# EAGLE board master - Copy (EAGLE 6.4)
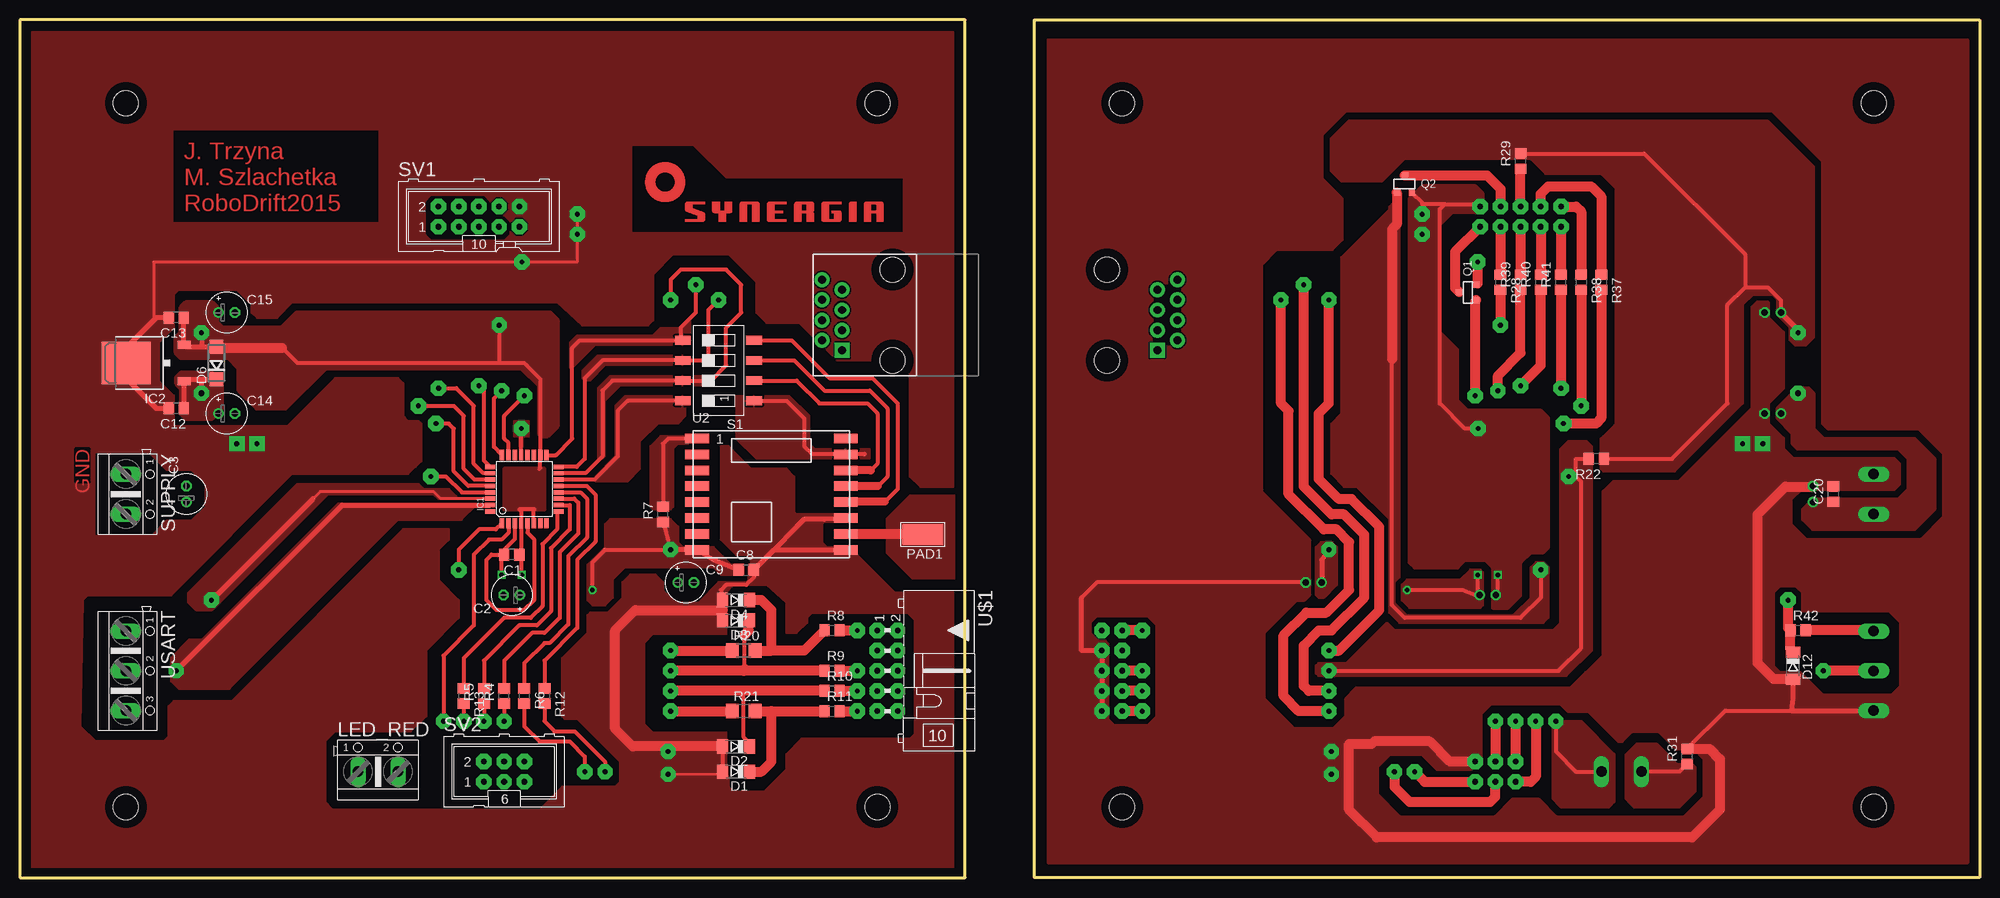
[diagram p0: board, top side]
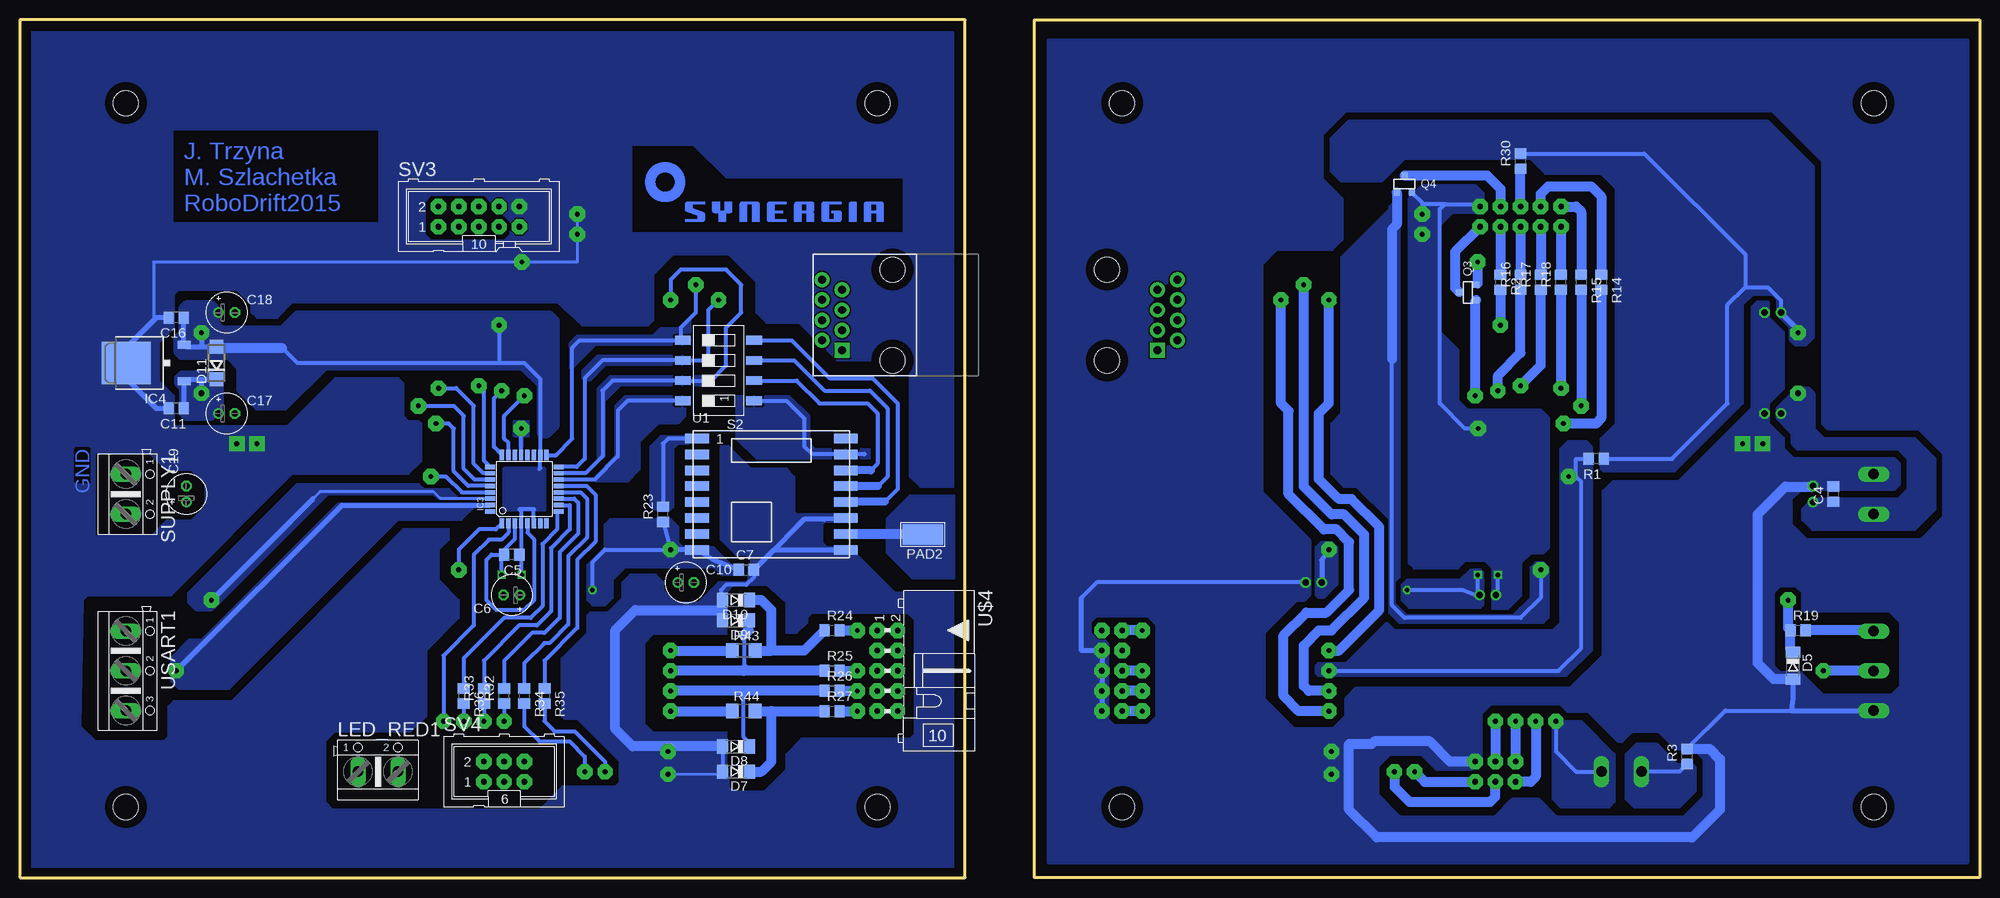
[diagram p1: board, bottom side, seen from below]

Size 246.7 x 107.95 mm. Coordinates in mm from the lower left corner, seen from the top.
Outline: 0,0 119,0 119,107.95 0,107.95 0,0
Outline: 246.7,0 127.7,0 127.7,107.95 246.7,107.95 246.7,0
Copper layers (1*16): Top 0.035mm / dielectric 1.5mm / Bottom 0.035mm
Design rules "default *": minimum track width 10mil, minimum drill 20mil, track to track 8mil, track to pad 8mil, pad to pad 8mil, via to via 8mil, smd to smd 8mil, copper to edge 40mil, drill to drill 8mil, minimum pad ring 10mil, minimum via ring 8mil, stop-mask expansion 4mil, vias tented up to drill 0mil, thermal gap 10mil
Holes 3.2 mm at 107.95,97.47 13.34,97.47 13.34,8.89 107.95,8.89 138.75,97.47 233.36,97.47 233.36,8.89 138.75,8.89

## Footprints (pad centres in the part's own frame; a part is rotated, then mirrored left to right if it is on the bottom)
C0805 = smd 1.3 x 1.5: 1 -0.95,0; 2 0.95,0
E2-5 = drill 0.813 pad 1.27: + -1.016,0 | drill 0.813 pad 1.27 octagon: - 1.016,0
SOD80C = smd 1.4 x 1.8: A 1.7,0; C -1.7,0
DO214AC = smd 1.8 x 1.7: A 2.05,0; C -2.05,0
TQFP32-08 = smd 1.27 x 0.559: 1 -4.293,2.8; 2 -4.293,2; 3 -4.293,1.2; 4 -4.293,0.4; 5 -4.293,-0.4; 6 -4.293,-1.2; 7 -4.293,-2; 8 -4.293,-2.8; 17 4.293,-2.8; 18 4.293,-2; 19 4.293,-1.2; 20 4.293,-0.4; 21 4.293,0.4; 22 4.293,1.2; 23 4.293,2; 24 4.293,2.8 | smd 0.559 x 1.27: 9 -2.8,-4.293; 10 -2,-4.293; 11 -1.2,-4.293; 12 -0.4,-4.293; 13 0.4,-4.293; 14 1.2,-4.293; 15 2,-4.293; 16 2.8,-4.293; 25 2.8,4.293; 26 2,4.293; 27 1.2,4.293; 28 0.4,4.293; 29 -0.4,4.293; 30 -1.2,4.293; 31 -2,4.293; 32 -2.8,4.293
TO252 = smd 1 x 1.6: 1 -2.28,-4.8; 2 2.28,-4.8 | smd 5.4 x 6.2: 3 0,2.5
AK500/2 = drill 1.321 long: 1 -2.515,0; 2 2.515,0
5-2,5 = smd 2.54 x 5.08: 1 0,0
SOT-23 = smd 0.762 x 0.762: 1 -0.979,-1.101; 2 0.94,-1.101; 3 0.025,1.067
R0805 = smd 1.3 x 1.5: 1 -0.95,0; 2 0.95,0
R1206 = smd 1.6 x 1.803: 1 -1.422,0; 2 1.422,0
SMS-004 = smd 1.092 x 2.007: 1 -3.81,-4.496; 2 -1.27,-4.496; 3 1.27,-4.496; 4 3.81,-4.496; 5 3.81,4.496; 6 1.27,4.496; 7 -1.27,4.496; 8 -3.81,4.496
ML10 = drill 0.7 pad 1.93 octagon: 1 -5.08,-1.27; 2 -5.08,1.27; 3 -2.54,-1.27; 4 -2.54,1.27; 5 0,-1.27; 6 0,1.27; 7 2.54,-1.27; 8 2.54,1.27; 9 5.08,-1.27; 10 5.08,1.27
ML6 = drill 0.7 pad 1.93 octagon: 1 -2.54,-1.27; 2 -2.54,1.27; 3 0,-1.27; 4 0,1.27; 5 2.54,-1.27; 6 2.54,1.27
RFM69W-XXXS2 = smd 3 x 1.2: 1 -9.35,7; 2 -9.35,5; 3 -9.35,3; 4 -9.35,1; 5 -9.35,-1; 6 -9.35,-3; 7 -9.35,-5; 8 -9.35,-7; 9 9.35,-7; 10 9.35,-5; 11 9.35,-3; 12 9.35,-1; 13 9.35,1; 14 9.35,3; 15 9.35,5; 16 9.35,7
ML10L = drill 0.7 pad 1.93 octagon: 1 -5.08,-1.27; 2 -5.08,1.27; 3 -2.54,-1.27; 4 -2.54,1.27; 5 0,-1.27; 6 0,1.27; 7 2.54,-1.27; 8 2.54,1.27; 9 5.08,-1.27; 10 5.08,1.27
RJ45-8 = drill 1 pad 1.88 square: 1 -4.445,6.35 | drill 1 pad 1.88: 2 -3.175,8.89; 3 -1.905,6.35; 4 -0.635,8.89; 5 0.635,6.35; 6 1.905,8.89; 7 3.175,6.35; 8 4.445,8.89 | hole 3.2: -5.715,0; 5.715,0
AK500/3 = drill 1.321 long: 1 -5.004,0; 2 0,0; 3 5.004,0

## Placement (x,y rotation side)
C1  100n  [C0805]  61.91,40.64 180 top
C2  22uF  [E2-5]  61.91,35.56 180 top
C3  220uF  [E2-5]  20.95,48.26 90 top
C4  100n  [C0805]  18.41,48.26 90 bottom
C5  100n  [C0805]  184.78,40.64 180 bottom
C6  22uF  [E2-5]  184.78,35.56 180 bottom
C7  100n  [C0805]  155.26,38.73 0 bottom
C8  100n  [C0805]  91.44,38.73 0 top
C9  4.7uF  [E2-5]  83.82,37.15 0 top
C10  4.7uF  [E2-5]  162.88,37.15 0 bottom
C11  100n  [C0805]  227.01,59.05 180 bottom
C12  100n  [C0805]  19.68,59.05 180 top
C13  100n  [C0805]  19.68,70.48 180 top
C14  4.7uF  [E2-5]  26.04,58.42 0 top
C15  4.7uF  [E2-5]  26.04,71.12 0 top
C16  100n  [C0805]  227.01,70.48 180 bottom
C17  4.7uF  [E2-5]  220.66,58.42 0 bottom
C18  4.7uF  [E2-5]  220.66,71.12 0 bottom
C19  220uF  [E2-5]  225.74,48.26 90 bottom
C20  100n  [C0805]  228.28,48.26 90 top
D1  3.3V  [SOD80C]  90.17,13.34 180 top
D2  3.3V  [SOD80C]  90.17,16.51 180 top
D3  3.3V  [SOD80C]  90.17,32.38 180 top
D4  3.3V  [SOD80C]  90.17,34.93 180 top
D5  3.3V  [SOD80C]  23.5,26.67 270 bottom
D6  BAS16HT1G  [DO214AC]  24.77,64.77 90 top
D7  3.3V  [SOD80C]  156.53,13.34 180 bottom
D8  3.3V  [SOD80C]  156.53,16.51 180 bottom
D9  3.3V  [SOD80C]  156.53,32.38 180 bottom
D10  3.3V  [SOD80C]  156.53,34.93 180 bottom
D11  BAS16HT1G  [DO214AC]  221.93,64.77 90 bottom
D12  3.3V  [SOD80C]  223.2,26.67 270 top
IC1  MEGA8-AI  [TQFP32-08]  63.5,48.9 90 top
IC2  lf33  [TO252]  15.88,64.77 90 top
IC3  MEGA8-AI  [TQFP32-08]  183.2,48.9 90 bottom
IC4  lf33  [TO252]  230.82,64.77 90 bottom
LED_RED  [AK500/2]  45.09,13.34 0 top
LED_RED1  [AK500/2]  201.61,13.34 0 bottom
PAD1  WIREPADSMD5-2,5  [5-2,5]  113.67,43.18 90 top
PAD2  WIREPADSMD5-2,5  [5-2,5]  133.03,43.18 90 bottom
Q1  [SOT-23]  182.25,73.66 90 top
Q2  [SOT-23]  174.31,87.31 0 top
Q3  [SOT-23]  64.45,73.66 90 bottom
Q4  [SOT-23]  72.39,87.31 0 bottom
R1  10k  [R0805]  48.26,52.7 180 bottom
R2  15R  [R0805]  60.33,74.93 270 bottom
R3  15R  [R0805]  36.83,15.24 90 bottom
R4  470  [R0805]  60.96,22.86 90 top
R5  470  [R0805]  58.42,22.86 90 top
R6  470  [R0805]  63.5,22.86 270 top
R7  10k  [R0805]  80.96,45.72 90 top
R8  220  [R0805]  102.23,31.12 0 top
R9  220  [R0805]  102.23,26.04 0 top
R10  220  [R0805]  102.23,23.5 0 top
R11  220  [R0805]  102.23,20.96 0 top
R12  470  [R0805]  66.04,22.86 270 top
R13  470  [R0805]  55.88,22.86 270 top
R14  470  [R0805]  47.62,74.93 270 bottom
R15  470  [R0805]  50.16,74.93 270 bottom
R16  470  [R0805]  57.78,74.93 90 bottom
R17  470  [R0805]  55.24,74.93 90 bottom
R18  470  [R0805]  52.7,74.93 90 bottom
R19  220  [R0805]  22.86,31.12 0 bottom
R20  0R  [R1206]  91.12,28.57 0 top
R21  0R  [R1206]  91.12,20.96 0 top
R22  10k  [R0805]  198.44,52.7 180 top
R23  10k  [R0805]  165.74,45.72 90 bottom
R24  220  [R0805]  144.46,31.12 0 bottom
R25  220  [R0805]  144.46,26.04 0 bottom
R26  220  [R0805]  144.46,23.5 0 bottom
R27  220  [R0805]  144.46,20.96 0 bottom
R28  15R  [R0805]  186.37,74.93 270 top
R29  15R  [R0805]  188.91,90.17 90 top
R30  15R  [R0805]  57.78,90.17 90 bottom
R31  15R  [R0805]  209.87,15.24 90 top
R32  470  [R0805]  185.74,22.86 90 bottom
R33  470  [R0805]  188.28,22.86 90 bottom
R34  470  [R0805]  183.2,22.86 270 bottom
R35  470  [R0805]  180.66,22.86 270 bottom
R36  470  [R0805]  190.82,22.86 270 bottom
R37  470  [R0805]  199.07,74.93 270 top
R38  470  [R0805]  196.53,74.93 270 top
R39  470  [R0805]  188.91,74.93 90 top
R40  470  [R0805]  191.45,74.93 90 top
R41  470  [R0805]  193.99,74.93 90 top
R42  220  [R0805]  223.84,31.12 0 top
R43  0R  [R1206]  155.57,28.57 0 bottom
R44  0R  [R1206]  155.57,20.96 0 bottom
S1  SWS004  [SMS-004]  87.95,63.82 90 top
S2  SWS004  [SMS-004]  158.75,63.82 90 bottom
SUPPLY  [AK500/2]  13.34,48.26 270 top
SUPPLY1  [AK500/2]  233.36,48.26 270 bottom
SV1  [ML10]  57.78,83.18 0 top
SV2  [ML6]  60.96,13.34 0 top
SV3  [ML10]  188.91,83.18 0 bottom
SV4  [ML6]  185.74,13.34 0 bottom
U1  RFM69HW  [RFM69W-XXXS2]  152.08,48.26 0 bottom
U2  RFM69HW  [RFM69W-XXXS2]  94.61,48.26 0 top
U$1  AVR_SPI_PROG2PTH2  [ML10L]  109.22,26.04 270 top
U$2  RJ45-8PTH  [RJ45-8]  109.86,70.8 90 top
U$3  [SYNERGIA_30MM]  78.74,82.55 0 top
U$4  AVR_SPI_PROG2PTH2  [ML10L]  137.48,26.04 270 bottom
U$5  RJ45-8PTH  [RJ45-8]  136.84,70.8 90 bottom
U$6  [SYNERGIA_30MM]  167.96,82.55 0 bottom
USART  [AK500/3]  13.34,26.04 270 top
USART1  [AK500/3]  233.36,26.04 270 bottom

## Library data of the parts
C1-C20 R1-R44 = rcl
D1-D12 = diode
IC1 IC3 = atmel; MPN: ATMEGA8-16AU; OC_FARNELL: 9171371; OC_NEWARK: 73M8863
IC2 IC4 = linear
LED_RED LED_RED1 SUPPLY SUPPLY1 USART USART1 = con-ptr500; OC_FARNELL: unknown; OC_NEWARK: unknown
PAD1 PAD2 = wirepad
Q1-Q4 = transistors
S1 S2 = smd-special
SV1-SV4 U$1 U$4 = con-harting-ml; OC_FARNELL: unknown; OC_NEWARK: unknown
U1 U2 = SparkFun-RF
U$2 U$5 = SparkFun
U$3 U$6 = synergia_logo

## Nets
+3V1: C5.1 C6.+ C7.1 C10.+ C16.1 C18.+ D11.A IC3.4 IC3.6 IC3.18 IC4.2 R22.1 R23.1 R28.2 R29.2 U1.8
+3V3: C1.1 C2.+ C8.1 C9.+ C13.1 C15.+ D6.A IC1.4 IC1.6 IC1.18 IC2.2 R1.1 R2.2 R7.1 R30.2 U2.8
GND: C1.2 C2.- C3.- C4.2 C8.2 C9.- C12.2 C13.2 C14.- C15.- D1.A D2.A D3.A D4.A D5.A IC1.3 IC1.5 IC1.21 IC2.3 Q3.2 Q4.2 R3.2 SUPPLY.1 SV1.10 SV2.6 U2.9 U2.11 U$1.4 U$1.6 U$1.8 U$1.10 USART.3
GND1: C5.2 C6.- C7.2 C10.- C11.2 C16.2 C17.- C18.- C19.- C20.2 D7.A D8.A D9.A D10.A D12.A IC3.3 IC3.5 IC3.21 IC4.3 Q1.2 Q2.2 R31.2 SUPPLY1.1 SV3.10 SV4.6 U1.9 U1.11 U$4.4 U$4.6 U$4.8 U$4.10 USART1.3
LED_FALSTART: R30.1 SV1.6
LED_FALSTART1: R29.1 SV3.6
LED_FALSTART_GATE: IC1.1 Q4.1
LED_FALSTART_GATE1: IC3.1 Q2.1
LED_FALSTART_GND: Q4.3 SV1.8
LED_FALSTART_GND1: Q2.3 SV3.8
LED_GO: R2.1 SV1.7
LED_GO1: R28.1 SV3.7
LED_GO_GATE: IC1.23 Q3.1
LED_GO_GATE1: IC3.23 Q1.1
LED_GO_GND: Q3.3 SV1.9
LED_GO_GND1: Q1.3 SV3.9
LED_RED: IC1.2 LED_RED.2
LED_RED1: IC3.2 LED_RED1.2
LED_S1: IC1.9 R13.1
LED_S2: IC1.10 R5.2
LED_S3: IC1.13 R12.1
LED_S4: IC1.11 R4.2
LED_S5: IC1.12 R6.1
LED_S6: IC3.9 R36.1
LED_S7: IC3.13 R35.1
LED_S8: IC3.12 R34.1
LED_S9: IC3.10 R33.2
LED_S10: IC3.11 R32.2
LED_Y1: IC1.26 R18.1
LED_Y2: IC1.27 R15.2
LED_Y3: IC1.25 R17.1
LED_Y4: IC1.28 R14.2
LED_Y5: IC1.24 R16.1
LED_Y6: IC3.26 R41.1
LED_Y7: IC3.27 R38.2
LED_Y8: IC3.25 R40.1
LED_Y9: IC3.28 R37.2
LED_Y10: IC3.24 R39.1
MISO: IC1.16 R21.1 S1.6
MISO1: IC3.16 R44.1 S2.6
MOSI: IC1.15 R20.1 S1.7
MOSI1: IC3.15 R43.1 S2.7
N$1: D1.C R11.1 R21.2
N$2: D4.C R8.1 R20.2
N$3: LED_RED.1 R3.1
N$4: R4.1 SV2.4
N$5: R5.1 SV2.2
N$6: R6.2 SV2.5
N$7: R7.2 U2.1
N$8: S1.1 U2.15
N$9: PAD1.1 U2.10
N$10: S1.4 U2.12
N$11: S1.3 U2.13
N$12: S1.2 U2.14
N$13: R8.2 U$1.1
N$14: R11.2 U$1.9
N$15: R10.2 U$1.7
N$16: R9.2 U$1.5
N$19: R12.2 SV2.3
N$20: R13.2 SV2.1
N$21: R14.1 SV1.4
N$22: R15.1 SV1.2
N$23: R16.2 SV1.5
N$24: R17.2 SV1.3
N$25: R18.2 SV1.1
N$26: R19.2 USART.1
N$32: R23.2 U1.1
N$33: PAD2.1 U1.10
N$34: R24.2 U$4.1
N$35: R27.2 U$4.9
N$36: R26.2 U$4.7
N$37: R25.2 U$4.5
N$38: LED_RED1.1 R31.1
N$39: R32.1 SV4.4
N$40: R33.1 SV4.2
N$41: R34.2 SV4.5
N$42: R35.2 SV4.3
N$43: R36.2 SV4.1
N$44: R37.1 SV3.4
N$45: R38.1 SV3.2
N$46: R39.2 SV3.5
N$47: R40.2 SV3.3
N$48: R41.2 SV3.1
N$49: R42.2 USART1.1
N$57: D10.C R24.1 R43.2
N$58: D7.C R27.1 R44.2
N$59: S2.1 U1.15
N$60: S2.4 U1.12
N$61: S2.3 U1.13
N$62: S2.2 U1.14
RESET: D3.C IC1.29 R1.2 R9.1
RESET1: D9.C IC3.29 R22.2 R25.1
RX: D5.C IC1.30 R19.1
RX1: D12.C IC3.30 R42.1
SCK: D2.C IC1.17 R10.1 S1.5
SCK1: D8.C IC3.17 R26.1 S2.5
SS: IC1.14 S1.8
SS1: IC3.14 S2.8
TXD: IC1.31 USART.2
TXD1: IC3.31 USART1.2
VCC: C3.+ C4.1 C12.1 C14.+ D6.C IC2.1 SUPPLY.2
VCC1: C11.1 C17.+ C19.+ C20.1 D11.C IC4.1 SUPPLY1.2

## Tracks (layer width: path | path; a pad name or v marks a point on that pad's centre or on a via)
+3V1  (via drill 0.6, 0.6 pad 1.02, 0.6 pad 1.93)
  Top 0.508: v183.51,38.1 183.51,35.81 C6.+ 183.2,35.56 181.61,36.2 v174.62,36.2 | R22.1 207.96,52.7 214.95,59.69 214.95,72.07 217.17,74.29 | 217.17,74.29 220.03,74.29 221.68,72.64 C18.+ | R29.2 204.47,91.12 217.17,78.42 217.17,74.29
  Top 0.61: v164.78,41.27 163.89,40.01 C10.+ | C18.+ 223.84,68.96 v223.84,68.58
  Top 1.27: R28.2 v186.37,69.53
  Bottom 0.508: v183.51,38.1 183.51,40.32 C5.1 arc-90 183.6,40.88 IC3.4 183.6,46.12 183.83,46.36 181.93,46.36 182,46.29 IC3.6 | 213.68,66.67 211.77,64.77 186.37,64.77 | 186.37,64.77 183.2,64.77 181.2,62.77 IC3.18 181.2,51.53 181.29,51.44 | R23.1 v164.78,41.27 173.04,41.27 174.62,39.69 v174.62,36.2 | v186.37,69.53 186.37,64.77
  Bottom 0.61: C7.1 159.37,39.99 U1.8 163.35,41.27 v164.78,41.27 | 223.84,66.82 225.79,66.82 IC4.2 226.06,67.08 C16.1 | 223.84,66.82 D11.A 221.79,66.67 | v223.84,68.58 223.84,66.82
  Bottom 1.27: 221.79,66.67 213.68,66.67
  pour Bottom (no thermals): 213.36,59.05 216.85,59.05 219.07,61.28 219.07,64.13 220.34,65.4 226.38,65.4 227.01,66.04 227.01,67.94 226.38,68.58 226.38,71.75 225.74,72.39 222.57,72.39 221.93,71.75 221.93,69.85 221.3,69.21 213.68,69.21 211.77,71.12 180.02,71.12 179.07,70.17 179.07,56.83 180.34,55.56 180.97,55.56 181.29,55.88 181.29,61.91 183.51,64.13 208.28,64.13
  pour Bottom: 180.66,51.44 185.74,51.44 185.74,46.36 180.66,46.36
  pour Top (no thermals): 171.45,87.63 166.37,87.63 165.1,88.9 165.1,93.03 167.32,95.25 220.03,95.25 225.74,89.53 225.74,67.94 224.79,66.99 223.52,66.99 222.88,67.63 222.88,69.21 221.3,70.8 221.3,72.71 220.66,73.34 218.12,73.34 216.85,72.07 216.85,59.69 208.28,51.12 199.39,51.12 199.07,51.44 199.07,55.24 200.98,57.15 200.98,86.68 199.07,88.58 192.09,88.58 190.18,90.49 174.31,90.49
  pour Top (no thermals): 183.83,33.97 174.94,33.97 173.99,34.93 173.99,36.83 174.62,37.47 181.29,37.47 182.56,38.73 183.83,38.73 184.15,38.42 184.15,34.29
  pour Top (no thermals): 165.74,41.59 165.74,36.83 164.15,35.24 163.51,35.24 163.19,35.56 163.19,41.59 163.83,42.23 165.1,42.23
  pour Bottom (no thermals): 156.21,38.1 158.43,38.1 159.38,39.05 170.5,39.05 172.09,37.47 172.09,35.24 173.04,34.29 174.62,34.29 175.26,34.93 175.26,39.37 173.04,41.59 173.04,44.45 172.4,45.09 164.78,45.09 163.83,44.13 163.83,42.23 163.19,41.59 159.38,41.59 157.16,39.37 156.21,39.37
+3V3  (via drill 0.6, 0.6 pad 1.02, 0.6 pad 1.93)
  Top 0.508: v63.18,38.1 63.18,40.32 C1.1 arc90 63.1,40.88 IC1.4 63.1,46.12 62.87,46.36 64.77,46.36 64.7,46.29 IC1.6 | 33.02,66.67 34.92,64.77 60.33,64.77 | 60.33,64.77 63.5,64.77 65.5,62.77 IC1.18 65.5,51.53 65.41,51.44 | R7.1 v81.92,41.27 73.66,41.27 72.07,39.69 v72.07,36.2 | v60.33,69.53 60.33,64.77
  Top 0.61: C8.1 87.33,39.99 U2.8 83.34,41.27 v81.92,41.27 | 22.86,66.82 20.91,66.82 IC2.2 20.64,67.08 C13.1 | 22.86,66.82 D6.A 24.91,66.67 | v22.86,68.58 22.86,66.82
  Top 1.27: 24.91,66.67 33.02,66.67
  Bottom 0.508: v63.18,38.1 63.18,35.81 C2.+ 63.5,35.56 65.09,36.2 v72.07,36.2 | R1.1 38.73,52.7 31.75,59.69 31.75,72.07 29.53,74.29 | 29.53,74.29 26.67,74.29 25.02,72.64 C15.+ | R30.2 42.23,91.12 29.53,78.42 29.53,74.29
  Bottom 0.61: v81.92,41.27 82.8,40.01 C9.+ | C15.+ 22.86,68.96 v22.86,68.58
  Bottom 1.27: R2.2 v60.33,69.53
  pour Top (no thermals): 33.34,59.05 29.84,59.05 27.62,61.28 27.62,64.13 26.35,65.4 20.32,65.4 19.68,66.04 19.68,67.94 20.32,68.58 20.32,71.75 20.95,72.39 24.13,72.39 24.77,71.75 24.77,69.85 25.4,69.21 33.02,69.21 34.92,71.12 66.67,71.12 67.63,70.17 67.63,56.83 66.36,55.56 65.72,55.56 65.41,55.88 65.41,61.91 63.18,64.13 38.42,64.13
  pour Top: 66.04,51.44 60.96,51.44 60.96,46.36 66.04,46.36
  pour Bottom (no thermals): 75.25,87.63 80.33,87.63 81.6,88.9 81.6,93.03 79.38,95.25 26.67,95.25 20.95,89.53 20.95,67.94 21.91,66.99 23.18,66.99 23.81,67.63 23.81,69.21 25.4,70.8 25.4,72.71 26.04,73.34 28.57,73.34 29.84,72.07 29.84,59.69 38.42,51.12 47.31,51.12 47.62,51.44 47.62,55.24 45.72,57.15 45.72,86.68 47.62,88.58 54.61,88.58 56.52,90.49 72.39,90.49
  pour Bottom (no thermals): 62.87,33.97 71.75,33.97 72.71,34.93 72.71,36.83 72.07,37.47 65.41,37.47 64.14,38.73 62.87,38.73 62.55,38.42 62.55,34.29
  pour Bottom (no thermals): 80.96,41.59 80.96,36.83 82.55,35.24 83.19,35.24 83.5,35.56 83.5,41.59 82.87,42.23 81.6,42.23
  pour Top (no thermals): 90.49,38.1 88.27,38.1 87.31,39.05 76.2,39.05 74.61,37.47 74.61,35.24 73.66,34.29 72.39,34.29 72.07,34.29 71.44,34.93 71.44,39.37 73.66,41.59 73.66,44.45 74.3,45.09 81.92,45.09 82.87,44.13 82.87,42.23 83.5,41.59 87.31,41.59 89.53,39.37 90.49,39.37
GND  (via drill 0.6, 0.6 pad 1.93)
  Top 0.305: 88.27,13.02 v81.6,13.02
  Top 0.406: v70.17,83.5 v70.17,80.96 70.17,77.47 v63.18,77.47 16.83,77.47 16.83,70.17
  Top 0.508: v60.64,38.1 60.64,40.32 arc-90 C1.2 | IC1.5 63.9,43.41 64.71,42.61 64.71,34.93 63.44,33.66 60.01,33.66 58.74,34.93 58.74,40.01 59.37,40.64 C1.2 | D3.A 88.47,33.66 D4.A 88.27,35.13 88.27,36.2 88.9,36.83 91.44,36.83 92.39,37.78 C8.2 | D2.A D1.A | IC1.21 63.1,56.5 v63.12,56.52 | IC1.3 62.3,42.62 60.96,41.27 C1.2
  Top 0.61: C8.2 94.92,41.26 | 94.92,41.26 U2.9 | U2.11 101.25,45.09 98.74,45.09 97.79,44.13 94.92,41.26 | C13.2 17.14,70.48 16.83,70.17 13.38,66.71 IC2.3 13.38,62.82 17.14,59.05 C12.2
  Top 1.27: D2.A 77.15,16.51 74.93,18.73 74.93,31.12 77.47,33.66 88.47,33.66
  Bottom 0.508: C2.- 60.64,35.81 v60.64,38.1 | C9.- 111.12,37.15 113.03,35.24 | R3.2 31.99,21.03 23.68,21.03 | v63.12,56.52 64.77,56.52 67.94,59.69 67.94,84.14 67.31,84.77 | Q4.2 70.17,84.93 70.17,84.77 | 70.17,84.77 v70.17,83.5 | 67.31,84.77 63.18,84.77 SV1.10 | 67.31,84.77 70.17,84.77
  Bottom 0.61: U$1.10 U$1.8 U$1.6 U$1.4 113.03,28.57 113.03,35.24 | D5.A 23.5,22.54 23.68,21.03 USART.3 | Q3.2 63.18,74.77
  Bottom 1.27: SV2.6 66.67,14.61 69.22,17.14 76.2,17.14 76.52,16.83 79.38,16.83 79.38,8.57 75.88,5.08 36.2,5.08 32.7,8.57 32.7,14.92 33.97,16.19 R3.2 | D5.A 25.92,24.97 27.94,26.99 27.94,45.72 24.45,49.21 21.02,49.21 C3.- | 63.18,74.77 v63.18,77.47
  other vias: 29.84,54.61 27.3,54.61 81.6,15.88
  pour Bottom (no thermals): 26.67,72.39 26.67,70.48 24.77,68.58 24.77,61.6 26.67,59.69 26.67,57.15 24.77,55.24 24.77,53.98 23.5,52.7 10.79,52.7 10.16,52.07 10.16,49.53 10.79,48.9 22.54,48.9 23.81,47.62 23.81,44.45 21.91,42.55 7.3,42.55 4.45,45.4 4.45,53.34 7.62,56.52 19.05,56.52 19.68,57.15 19.68,90.17 26.04,96.52 79.85,96.52 82.79,93.58 82.79,105.41 1.59,105.41 1.59,1.91 117.16,1.91 117.16,105.41 82.87,105.41 82.87,87.95 80.33,85.41 80.33,80.33 81.6,79.06 88.58,79.06 90.49,77.15 90.49,48.58 84.45,42.55 84.45,35.56 85.09,34.93 86.04,34.93 90.17,30.8 90.17,22.54 86.36,18.73 81.28,18.73 79.69,20.32 79.69,22.54 78.42,23.81 60.64,23.81 60.64,21.91 61.59,21.91 62.87,20.64 62.87,14.29 64.14,13.65 68.26,13.65 70.17,15.56 74.3,15.56 75.88,13.97 75.88,10.48 73.03,7.62 60.96,7.62 58.74,9.84 55.56,9.84 53.34,7.62 37.15,7.62 34.61,10.16 34.61,14.92 35.88,16.19 38.1,16.19 40.32,18.41 43.81,18.41 45.09,17.14 45.4,17.14 49.21,20.96 51.75,20.96 52.7,21.91 60.56,21.91 60.56,23.81 51.44,23.81 47.31,27.94 47.31,48.58 46.04,49.85 37.78,49.85 28.57,59.05 28.57,71.75 27.94,72.39
  pour Top: 63.31,54.29 63.31,55.56 64.07,55.56 64.07,57.47 62.23,57.47 62.23,55.56 62.93,55.56 62.93,54.29
  pour Bottom (no thermals): 55.24,58.74 64.45,58.74 65.72,60.01 65.72,66.36 67.94,68.58 67.94,82.23 66.36,83.82 62.87,83.82 62.55,84.14 62.55,86.04 63.5,86.99 70.17,86.99 71.75,85.41 71.75,39.69 71.12,39.05 65.72,39.05 64.77,40.01 62.23,40.01 61.28,39.05 61.28,33.97 59.37,33.97 57.78,35.56 57.78,39.69 56.52,40.96 54.93,40.96 54.29,41.59 54.29,57.79
  pour Top (no thermals): 103.19,45.4 102.87,45.72 97.79,45.72 97.47,46.04 97.47,50.48 96.52,51.44 92.08,51.44 89.22,54.29 88.27,54.29 88.27,42.55 90.17,40.64 91.44,40.64 92.08,40.01 92.08,39.37 92.39,39.05 94.61,41.27 103.19,41.27 102.55,41.59 101.6,41.59 100.97,42.23 100.97,44.45 101.28,44.77 102.87,44.77 103.19,45.09
  pour Top (no thermals): 117.47,0.95 1.59,0.95 1.59,106.36 117.47,106.36 117.47,49.21 113.35,49.21 112.08,50.48 112.08,64.45 111.44,65.09 102.87,65.09 98.11,69.85 93.98,69.85 92.71,71.12 92.71,74.93 89.22,78.42 82.23,78.42 79.69,75.88 79.69,70.17 79.06,69.53 70.8,69.53 67.63,72.39 34.29,72.39 32.38,70.48 29.84,70.48 29.21,71.12 29.21,72.07 27.3,73.98 20,73.98 19.37,73.34 19.37,69.21 17.46,67.31 17.46,62.55 19.37,60.64 19.37,56.83 33.66,56.83 39.69,62.87 47.62,62.87 48.26,62.23 48.26,58.1 48.9,57.47 50.16,57.47 50.48,57.15 50.48,52.39 48.9,50.8 34.29,50.8 19.05,35.56 8.57,35.56 7.94,34.93 7.62,19.05 9.53,17.14 18.1,17.14 18.73,17.78 18.73,21.59 19.37,22.23 26.67,22.23 48.26,43.81 53.98,43.81 53.98,42.55 52.7,41.27 52.7,37.47 55.24,34.93 55.24,32.7 51.12,28.57 51.12,20.32 49.21,18.41 39.69,18.41 38.42,17.14 38.42,9.52 39.37,8.57 65.41,8.57 68.26,11.43 74.93,11.43 75.56,12.07 75.56,14.61 70.17,20 68.58,20 68.26,20.32 68.26,27.62 71.44,30.8 71.44,33.02 71.75,33.34 73.98,33.34 75.88,35.24 75.88,37.15 76.83,38.1 80.01,38.1 80.96,37.15 80.96,36.2 82.55,34.61 85.41,34.61 87.95,37.15 91.44,37.15 91.76,37.47 91.76,39.05 92.39,39.05 92.08,37.47 91.44,36.83 89.85,36.83 88.9,35.88 88.9,13.02 89.22,12.7 89.22,11.43 89.85,10.8 93.66,10.8 96.52,13.65 96.52,15.56 98.42,17.46 112.08,17.46 112.71,18.1 112.71,32.38 111.76,33.34 99.69,33.34 99.06,32.7 99.06,32.07 97.79,30.8 96.52,30.8 96.52,34.61 93.98,36.83 91.76,36.83 92.71,38.1 93.34,39.37 94.93,40.96 105.09,40.96 110.17,35.88 117.47,35.88
GND1  (via drill 0.6, 0.6 pad 1.93)
  Top 0.508: C6.- 186.06,35.81 v186.06,38.1 | C10.- 135.57,37.15 133.67,35.24 | R31.2 214.71,21.03 223.01,21.03 | v183.58,56.52 181.93,56.52 178.75,59.69 178.75,84.14 179.39,84.77 | Q2.2 176.53,84.93 176.53,84.77 | 176.53,84.77 v176.53,83.5 | 179.39,84.77 183.51,84.77 SV3.10 | 179.39,84.77 176.53,84.77
  Top 0.61: U$4.10 U$4.8 U$4.6 U$4.4 133.67,28.57 133.67,35.24 | D12.A 223.2,22.54 223.01,21.03 USART1.3 | Q1.2 183.51,74.77
  Top 1.27: SV4.6 180.02,14.61 177.48,17.14 170.5,17.14 170.18,16.83 167.32,16.83 167.32,8.57 170.81,5.08 210.5,5.08 214,8.57 214,14.92 212.73,16.19 R31.2 | D12.A 220.78,24.97 218.76,26.99 218.76,45.72 222.25,49.21 225.68,49.21 C19.- | 183.51,74.77 v183.51,77.47
  Bottom 0.305: 158.43,13.02 v165.1,13.02
  Bottom 0.406: v176.53,83.5 v176.53,80.96 176.53,77.47 v183.51,77.47 229.87,77.47 229.87,70.17
  Bottom 0.508: v186.06,38.1 186.06,40.32 arc90 C5.2 | IC3.5 182.8,43.41 181.99,42.61 181.99,34.93 183.26,33.66 186.69,33.66 187.96,34.93 187.96,40.01 187.32,40.64 C5.2 | D9.A 158.23,33.66 D10.A 158.43,35.13 158.43,36.2 157.8,36.83 155.26,36.83 154.31,37.78 C7.2 | D8.A D7.A | IC3.21 183.6,56.5 v183.58,56.52 | IC3.3 184.4,42.62 185.74,41.27 C5.2
  Bottom 0.61: C7.2 151.78,41.26 | 151.78,41.26 U1.9 | U1.11 145.45,45.09 147.96,45.09 148.91,44.13 151.78,41.26 | C16.2 229.55,70.48 229.87,70.17 233.32,66.71 IC4.3 233.32,62.82 229.55,59.05 C11.2
  Bottom 1.27: D8.A 169.54,16.51 171.77,18.73 171.77,31.12 169.23,33.66 158.23,33.66
  other vias: 216.85,54.61 219.39,54.61 165.1,15.88
  pour Top (no thermals): 220.03,72.39 220.03,70.48 221.93,68.58 221.93,61.6 220.03,59.69 220.03,57.15 221.93,55.24 221.93,53.98 223.2,52.7 235.9,52.7 236.54,52.07 236.54,49.53 235.9,48.9 224.16,48.9 222.88,47.62 222.88,44.45 224.79,42.55 239.4,42.55 242.25,45.4 242.25,53.34 239.08,56.52 227.65,56.52 227.01,57.15 227.01,90.17 220.66,96.52 166.85,96.52 163.91,93.58 163.91,105.41 245.11,105.41 245.11,1.91 129.54,1.91 129.54,105.41 163.83,105.41 163.83,87.95 166.37,85.41 166.37,80.33 165.1,79.06 158.12,79.06 156.21,77.15 156.21,48.58 162.24,42.55 162.24,35.56 161.61,34.93 160.66,34.93 156.53,30.8 156.53,22.54 160.34,18.73 165.42,18.73 167,20.32 167,22.54 168.28,23.81 186.06,23.81 186.06,21.91 185.1,21.91 183.83,20.64 183.83,14.29 182.56,13.65 178.44,13.65 176.53,15.56 172.4,15.56 170.81,13.97 170.81,10.48 173.67,7.62 185.74,7.62 187.96,9.84 191.13,9.84 193.36,7.62 209.55,7.62 212.09,10.16 212.09,14.92 210.82,16.19 208.6,16.19 206.38,18.41 202.88,18.41 201.61,17.14 201.29,17.14 197.49,20.96 194.94,20.96 193.99,21.91 186.13,21.91 186.13,23.81 195.26,23.81 199.39,27.94 199.39,48.58 200.66,49.85 208.91,49.85 218.12,59.05 218.12,71.75 218.76,72.39
  pour Bottom: 183.39,54.29 183.39,55.56 182.63,55.56 182.63,57.47 184.47,57.47 184.47,55.56 183.77,55.56 183.77,54.29
  pour Top (no thermals): 191.45,58.74 182.25,58.74 180.97,60.01 180.97,66.36 178.75,68.58 178.75,82.23 180.34,83.82 183.83,83.82 184.15,84.14 184.15,86.04 183.2,86.99 176.53,86.99 174.94,85.41 174.94,39.69 175.58,39.05 180.97,39.05 181.93,40.01 184.47,40.01 185.42,39.05 185.42,33.97 187.32,33.97 188.91,35.56 188.91,39.69 190.18,40.96 191.77,40.96 192.41,41.59 192.41,57.79
  pour Bottom (no thermals): 143.51,45.4 143.83,45.72 148.91,45.72 149.22,46.04 149.22,50.48 150.18,51.44 154.62,51.44 157.48,54.29 158.43,54.29 158.43,42.55 156.53,40.64 155.26,40.64 154.62,40.01 154.62,39.37 154.31,39.05 152.08,41.27 143.51,41.27 144.15,41.59 145.1,41.59 145.73,42.23 145.73,44.45 145.41,44.77 143.83,44.77 143.51,45.09
  pour Bottom (no thermals): 129.22,0.95 245.11,0.95 245.11,106.36 129.22,106.36 129.22,49.21 133.35,49.21 134.62,50.48 134.62,64.45 135.25,65.09 143.83,65.09 148.59,69.85 152.72,69.85 153.99,71.12 153.99,74.93 157.48,78.42 164.47,78.42 167,75.88 167,70.17 167.64,69.53 175.9,69.53 179.07,72.39 212.41,72.39 214.31,70.48 216.85,70.48 217.49,71.12 217.49,72.07 219.39,73.98 226.69,73.98 227.33,73.34 227.33,69.21 229.24,67.31 229.24,62.55 227.33,60.64 227.33,56.83 213.04,56.83 207.01,62.87 199.07,62.87 198.44,62.23 198.44,58.1 197.8,57.47 196.53,57.47 196.22,57.15 196.22,52.39 197.8,50.8 212.41,50.8 227.65,35.56 238.12,35.56 238.76,34.93 239.08,19.05 237.17,17.14 228.6,17.14 227.97,17.78 227.97,21.59 227.33,22.23 220.03,22.23 198.44,43.81 192.72,43.81 192.72,42.55 193.99,41.27 193.99,37.47 191.45,34.93 191.45,32.7 195.58,28.57 195.58,20.32 197.49,18.41 207.01,18.41 208.28,17.14 208.28,9.52 207.33,8.57 181.29,8.57 178.44,11.43 171.77,11.43 171.13,12.07 171.13,14.61 176.53,20 178.12,20 178.44,20.32 178.44,27.62 175.26,30.8 175.26,33.02 174.94,33.34 172.72,33.34 170.81,35.24 170.81,37.15 169.86,38.1 166.69,38.1 165.74,37.15 165.74,36.2 164.15,34.61 161.29,34.61 158.75,37.15 155.26,37.15 154.94,37.47 154.94,39.05 154.31,39.05 154.62,37.47 155.26,36.83 156.84,36.83 157.8,35.88 157.8,13.02 157.48,12.7 157.48,11.43 156.84,10.8 153.03,10.8 150.18,13.65 150.18,15.56 148.27,17.46 134.62,17.46 133.99,18.1 133.99,32.38 134.94,33.34 147,33.34 147.64,32.7 147.64,32.07 148.91,30.8 150.18,30.8 150.18,34.61 152.72,36.83 154.94,36.83 153.99,38.1 153.35,39.37 151.76,40.96 141.6,40.96 136.53,35.88 129.22,35.88
LED_FALSTART
  Bottom 1.27: SV1.6 R30.1
LED_FALSTART1
  Top 1.27: SV3.6 R29.1
LED_FALSTART_GATE  (via drill 0.6 pad 1.93)
  Top 0.508: IC1.1 59.91,43.81 57.78,43.81 55.24,41.27 v55.24,38.73
  Bottom 0.508: v55.24,38.73 55.24,35.24 57.78,32.7 72.39,32.7 73.98,34.29 73.98,65.28
  Bottom 1.27: Q4.1 73.37,82.21 73.98,81.6 73.98,65.28
  pour Bottom: 54.29,39.05 54.29,32.7 54.93,32.07 73.03,32.07 74.3,33.34 74.3,45.09 78.42,49.21 80.01,49.21 81.6,50.8 81.6,57.15 80.33,58.42 80.33,78.1 74.3,84.14 74.3,84.45 73.98,84.77 73.34,84.77 73.03,84.45 73.03,37.78 73.66,37.15 73.66,34.61 72.07,33.02 58.74,33.02 56.52,35.24 56.52,39.05 55.88,39.69 54.93,39.69
LED_FALSTART_GATE1  (via drill 0.6 pad 1.93)
  Top 0.508: v191.45,38.73 191.45,35.24 188.91,32.7 174.31,32.7 172.72,34.29 172.72,65.28
  Top 1.27: Q2.1 173.33,82.21 172.72,81.6 172.72,65.28
  Bottom 0.508: IC3.1 186.78,43.81 188.91,43.81 191.45,41.27 v191.45,38.73
  pour Top: 192.41,39.05 192.41,32.7 191.77,32.07 173.67,32.07 172.4,33.34 172.4,45.09 168.28,49.21 166.69,49.21 165.1,50.8 165.1,57.15 166.37,58.42 166.37,78.1 172.4,84.14 172.4,84.45 172.72,84.77 173.35,84.77 173.67,84.45 173.67,37.78 173.04,37.15 173.04,34.61 174.62,33.02 187.96,33.02 190.18,35.24 190.18,39.05 190.82,39.69 191.77,39.69
LED_FALSTART_GND
  Bottom 1.27: Q4.3 62.03,88.38 60.33,86.68 SV1.8
LED_FALSTART_GND1
  Top 1.27: Q2.3 184.67,88.38 186.37,86.68 SV3.8
LED_GO
  Bottom 1.27: SV1.7 R2.1
LED_GO1
  Top 1.27: SV3.7 R28.1
LED_GO_GATE  (via drill 0.6 pad 1.93)
  Top 0.508: IC1.23 61.5,54.7 60.96,55.24 60.96,58.1 v63.5,60.64
  Bottom 1.27: v63.5,60.64 63.5,72.53 Q3.1
LED_GO_GATE1  (via drill 0.6 pad 1.93)
  Top 1.27: v183.2,60.64 183.2,72.53 Q1.1
  Bottom 0.508: IC3.23 185.2,54.7 185.74,55.24 185.74,58.1 v183.2,60.64
LED_GO_GND
  Bottom 1.27: SV1.9 66.04,78.74 66.04,74.21 Q3.3
LED_GO_GND1
  Top 1.27: SV3.9 180.66,78.74 180.66,74.21 Q1.3
LED_RED  (via drill 0.6 pad 1.93)
  Top 0.508: IC1.2 61.5,43.4 60.64,42.55 59.05,42.55 57.15,40.64 57.15,31.75 53.34,27.94 v53.34,19.69
  Bottom 0.508: v53.34,19.69 53.34,15.88 50.8,13.34 LED_RED.2
  pour Bottom (no thermals): 46.04,15.56 46.04,9.52 46.67,8.89 52.7,8.89 53.66,9.84 53.66,19.05 53.02,19.05 52.39,19.69 50.16,19.69
LED_RED1  (via drill 0.6 pad 1.93)
  Top 0.508: v193.36,19.69 193.36,15.88 195.9,13.34 LED_RED1.2
  Bottom 0.508: IC3.2 185.2,43.4 186.06,42.55 187.64,42.55 189.55,40.64 189.55,31.75 193.36,27.94 v193.36,19.69
  pour Top (no thermals): 200.66,15.56 200.66,9.52 200.03,8.89 193.99,8.89 193.04,9.84 193.04,19.05 193.68,19.05 194.31,19.69 196.53,19.69
LED_S1
  Top 0.508: IC1.9 67.63,45.93 67.63,43.81 65.79,41.97 65.79,34.16 64.33,32.7 60.96,32.7 55.88,27.62 R13.1
LED_S2
  Top 0.508: IC1.10 69.22,46.9 69.22,43.81 66.86,41.47 66.86,33.53 65.09,31.75 62.87,31.75 58.42,27.3 R5.2
LED_S3
  Top 0.508: IC1.13 71.36,49.3 72.45,48.2 72.45,42.29 70.17,40.01 70.17,31.43 66.04,27.3 R12.1
LED_S4
  Top 0.508: IC1.11 69.78,47.7 70.29,47.18 70.29,43.31 67.94,40.96 67.94,32.7 66.04,30.8 64.45,30.8 60.96,27.3 R4.2
LED_S5
  Top 0.508: IC1.12 70.57,48.49 71.37,47.69 71.37,42.8 69.03,40.45 69.03,31.88 66.67,29.53 66.04,29.53 63.5,26.99 R6.1
LED_S6
  Bottom 0.508: IC3.9 179.07,45.93 179.07,43.81 180.91,41.97 180.91,34.16 182.37,32.7 185.74,32.7 190.82,27.62 R36.1
LED_S7
  Bottom 0.508: IC3.13 175.34,49.3 174.24,48.2 174.24,42.29 176.53,40.01 176.53,31.43 180.66,27.3 R35.1
LED_S8
  Bottom 0.508: IC3.12 176.13,48.49 175.32,47.69 175.32,42.8 177.67,40.45 177.67,31.88 180.02,29.53 180.66,29.53 183.2,26.99 R34.1
LED_S9
  Bottom 0.508: IC3.10 177.48,46.9 177.48,43.81 179.83,41.47 179.83,33.53 181.61,31.75 183.83,31.75 188.28,27.3 R33.2
LED_S10
  Bottom 0.508: IC3.11 176.92,47.7 176.4,47.18 176.4,43.31 178.75,40.96 178.75,32.7 180.66,30.8 182.25,30.8 185.74,27.3 R32.2
LED_Y1  (via drill 0.6 pad 1.93)
  Top 0.508: IC1.26 58.33,50.9 57.15,52.07 57.15,59.37 54.93,61.6 v52.7,61.6
  Bottom 1.27: R18.1 v52.7,61.6
LED_Y2  (via drill 0.6 pad 1.93)
  Top 0.508: IC1.27 57.22,50.09 55.88,51.44 55.88,58.1 54.61,59.37 v50.16,59.37
  Bottom 1.27: R15.2 v50.16,59.37
LED_Y3  (via drill 0.6 pad 1.93)
  Top 0.508: IC1.25 58.42,52.48 58.42,61.28 v57.78,61.91
  Bottom 1.27: v57.78,61.91 55.24,64.45 R17.1
LED_Y4  (via drill 0.6 pad 1.93)
  Top 0.508: IC1.28 56.43,49.3 54.61,51.12 54.61,56.52 53.98,57.15 v52.39,57.15
  Bottom 1.27: R14.2 47.62,57.79 48.26,57.15 v52.39,57.15
LED_Y5  (via drill 0.6 pad 1.93)
  Top 0.508: IC1.24 59.69,54.2 59.69,60.33 v60.64,61.28
  Bottom 1.27: v60.64,61.28 60.64,63.18 57.78,66.04 R16.1
LED_Y6  (via drill 0.6 pad 1.93)
  Top 1.27: R41.1 v193.99,61.6
  Bottom 0.508: IC3.26 188.37,50.9 189.55,52.07 189.55,59.37 191.77,61.6 v193.99,61.6
LED_Y7  (via drill 0.6 pad 1.93)
  Top 1.27: R38.2 v196.53,59.37
  Bottom 0.508: IC3.27 189.48,50.09 190.82,51.44 190.82,58.1 192.09,59.37 v196.53,59.37
LED_Y8  (via drill 0.6 pad 1.93)
  Top 1.27: v188.91,61.91 191.45,64.45 R40.1
  Bottom 0.508: IC3.25 188.28,52.48 188.28,61.28 v188.91,61.91
LED_Y9  (via drill 0.6 pad 1.93)
  Top 1.27: R37.2 199.07,57.79 198.44,57.15 v194.31,57.15
  Bottom 0.508: IC3.28 190.26,49.3 192.09,51.12 192.09,56.52 192.72,57.15 v194.31,57.15
LED_Y10  (via drill 0.6 pad 1.93)
  Top 1.27: v186.06,61.28 186.06,63.18 188.91,66.04 R39.1
  Bottom 0.508: IC3.24 187.01,54.2 187.01,60.33 v186.06,61.28
MISO  (via drill 0.6 pad 1.93)
  Top 0.508: IC1.16 70.11,51.7 71.12,52.7 71.12,62.87 73.34,65.09 S1.6 86.04,65.09 86.68,65.72 86.68,71.44 v87.95,72.71
  Top 1.27: v81.92,20.96 R21.1
  Bottom 1.27: v81.92,20.96 85.72,20.96 87.63,22.86 87.63,30.48 84.77,33.34 82.23,33.34 79.38,36.2 79.38,42.23 80.96,43.81 82.55,43.81 87,48.26 87,58.74 87.95,59.69 v87.95,72.71
  pour Top: 84.77,65.72 72.71,65.72 70.8,63.82 70.8,62.87 71.12,62.55 71.75,62.55 73.66,64.45 84.77,64.45
MISO1  (via drill 0.6 pad 1.93)
  Top 1.27: v164.78,20.96 160.97,20.96 159.07,22.86 159.07,30.48 161.93,33.34 164.47,33.34 167.32,36.2 167.32,42.23 165.74,43.81 164.15,43.81 159.7,48.26 159.7,58.74 158.75,59.69 v158.75,72.71
  Bottom 0.508: IC3.16 176.59,51.7 175.58,52.7 175.58,62.87 173.35,65.09 S2.6 160.66,65.09 160.02,65.72 160.02,71.44 v158.75,72.71
  Bottom 1.27: v164.78,20.96 R44.1
  pour Bottom: 161.93,65.72 173.99,65.72 175.9,63.82 175.9,62.87 175.58,62.55 174.94,62.55 173.04,64.45 161.93,64.45
MOSI  (via drill 0.6 pad 1.93)
  Top 0.508: IC1.15 71.22,50.9 73.34,53.02 73.34,61.28 74.61,62.55 S1.7 87,62.55 88.9,64.45 88.9,69.21 90.81,71.12 90.81,74.61 88.9,76.52 83.19,76.52 81.92,75.25 v81.92,72.71
  Top 1.27: v81.92,28.57 R20.1
  Bottom 1.27: v81.92,28.57 80.64,28.57 75.56,33.66 75.56,44.13 79.06,47.62 80.64,47.62 83.19,50.16 83.19,58.42 81.92,59.69 v81.92,72.71
  pour Top: 73.66,53.02 73.66,60.01 75.56,61.91 86.68,61.91 87.31,62.55 87.31,63.18 74.3,63.18 72.71,61.6 72.71,52.7 73.34,52.7
MOSI1  (via drill 0.6 pad 1.93)
  Top 1.27: v164.78,28.57 166.05,28.57 171.13,33.66 171.13,44.13 167.64,47.62 166.05,47.62 163.51,50.16 163.51,58.42 164.78,59.69 v164.78,72.71
  Bottom 0.508: IC3.15 175.48,50.9 173.35,53.02 173.35,61.28 172.09,62.55 S2.7 159.7,62.55 157.8,64.45 157.8,69.21 155.89,71.12 155.89,74.61 157.8,76.52 163.51,76.52 164.78,75.25 v164.78,72.71
  Bottom 1.27: v164.78,28.57 R43.1
  pour Bottom: 173.04,53.02 173.04,60.01 171.13,61.91 160.02,61.91 159.38,62.55 159.38,63.18 172.4,63.18 173.99,61.6 173.99,52.7 173.35,52.7
N$1
  Top 1.27: R21.2 94.61,20.96 | 94.61,20.96 R11.1 | D1.C 93.34,13.34 94.61,14.61 94.61,20.96
N$2
  Top 1.27: R8.1 98.75,28.57 94.61,28.57 | 94.61,28.57 94.61,33.66 93.34,34.93 D4.C | R20.2 94.61,28.57
N$3
  Bottom 0.508: R3.1 37.78,13.34 LED_RED.1
  pour Bottom (no thermals): 38.1,14.29 36.2,14.29 35.88,13.97 35.88,10.8 37.78,8.89 43.5,8.89 44.45,9.84 44.45,15.56 43.18,16.83 40.64,16.83
N$4  (via drill 0.6 pad 1.93)
  Top 0.508: R4.1 v60.96,19.69
  Bottom 1.27: v60.96,19.69 SV2.4
N$5  (via drill 0.6 pad 1.93)
  Top 0.508: R5.1 v58.42,19.69
  Bottom 1.27: v58.42,19.69 SV2.2
N$6  (via drill 0.6 pad 1.93)
  Top 0.508: R6.2 63.5,19.05 65.41,17.14 69.22,17.14 71.12,15.24 v71.12,13.34
  Bottom 1.27: v71.12,13.34 69.85,12.07 SV2.5
N$7
  Top 0.508: U2.1 81.61,55.26 80.96,54.61 R7.2
  pour Top (no thermals): 85.09,55.56 80.64,55.56 79.38,54.29 79.38,46.67 79.69,46.36 81.28,46.36 81.92,46.36 82.23,46.67 82.23,53.98 82.87,54.61 84.14,54.61
N$8
  Top 0.508: S1.1 96.52,60.01 98.74,57.79 98.74,54.29 99.69,53.34 106.36,53.34 106.28,53.26 U2.15
  pour Top: 96.84,60.64 90.17,60.64 90.17,55.24 92.71,52.7 107,52.7 107,53.98 100.01,53.98 99.38,54.61 99.38,58.1
N$9
  Top 0.61: 112.31,43.26 PAD1.1
  Top 1.27: U2.10 112.31,43.26
  pour Top (no thermals): 118.75,47.94 112.08,47.94 109.22,45.09 109.22,40.96 112.39,37.78 120.02,37.78 120.02,46.67
N$10
  Top 0.508: S1.4 97.16,67.63 101.92,62.87 107.31,62.87 110.49,59.69 110.49,48.9 108.9,47.31 | 104.01,47.31 U2.12
  Top 1.016: 108.9,47.31 104.01,47.31
N$11
  Top 0.508: S1.3 97.47,65.09 101.28,61.28 107,61.28 109.22,59.05 109.22,50.48 108,49.26
  Top 1.016: 108,49.26 U2.13
N$12
  Top 0.508: S1.2 97.79,62.55 100.65,59.69 106.68,59.69 107.95,58.42 107.95,52.07 107.14,51.26
  Top 1.016: 107.14,51.26 U2.14
N$13  (via drill 0.6 pad 1.93)
  Top 1.27: R8.2 v105.41,31.12
  Bottom 1.27: v105.41,31.12 U$1.1
N$14  (via drill 0.6 pad 1.93)
  Top 1.27: R11.2 v105.41,20.96
  Bottom 1.27: v105.41,20.96 U$1.9
N$15  (via drill 0.6 pad 1.93)
  Top 1.27: R10.2 v105.41,23.5
  Bottom 1.27: v105.41,23.5 U$1.7
N$16  (via drill 0.6 pad 1.93)
  Top 1.27: R9.2 v105.41,26.04
  Bottom 1.27: v105.41,26.04 U$1.5
N$17
  cutout Bottom: 111.12,32.7 104.78,32.7 103.82,31.75 103.82,20.32 104.78,19.37 108.9,19.37 109.54,20 109.54,29.53 110.17,30.16 111.12,30.16 111.76,30.8 111.76,32.07
N$18
  cutout Top (no thermals): 58.42,85.72 51.75,85.72 51.12,85.09 51.12,80.96 51.75,80.33 60.96,80.33 61.59,80.96 61.59,82.55 60.96,83.18 60.01,83.18 59.05,84.14 59.05,85.09
N$19  (via drill 0.6 pad 1.93)
  Top 0.508: R12.2 66.04,19.69 67.31,18.41 69.85,18.41 73.66,14.61 v73.66,13.34
  Bottom 1.27: v73.66,13.34 73.66,11.43 71.75,9.52 61.59,9.52 60.96,10.16 SV2.3
N$20  (via drill 0.6 pad 1.93)
  Top 0.508: R13.2 v55.88,19.69
  Bottom 1.27: v55.88,19.69 55.88,12.7 56.52,12.07 SV2.1
N$21
  Bottom 1.27: SV1.4 55.24,86.04 54.29,86.99 48.9,86.99 47.62,85.72 R14.1
N$22
  Bottom 1.27: SV1.2 50.8,84.45 50.16,83.82 R15.1
N$23
  Bottom 1.27: SV1.5 R16.2
N$24
  Bottom 1.27: SV1.3 R17.2
N$25
  Bottom 1.27: SV1.1 R18.2
N$26
  Bottom 0.61: USART.1 13.41,31.12
  Bottom 1.27: 13.41,31.12 R19.2
N$27
  cutout Top (no thermals): 9.53,53.34 9.53,43.18 16.51,43.18 18.41,45.09 21.59,45.09 23.18,46.67 23.18,49.53 21.59,51.12 18.41,51.12 16.19,53.34
N$28
  cutout Top (no thermals): 89.53,30.48 89.53,18.41 79.69,18.41 78.74,19.37 78.74,29.53 79.69,30.48
N$29
  cutout Top (no thermals): 19.37,93.98 19.37,82.55 45.09,82.55 45.09,93.98
N$30
  cutout Top (no thermals): 77.15,92.07 84.77,92.07 88.9,87.95 111.12,87.95 111.12,81.28 77.15,81.28
N$31
  cutout Bottom (no thermals): 25.08,26.04 25.72,26.67 25.72,35.88 25.08,36.51 23.18,36.51 22.54,35.88 22.54,33.34 11.43,33.34 10.16,32.07 10.16,24.13 11.11,23.18 19.68,23.18 22.54,26.04
N$32
  Bottom 0.508: U1.1 165.09,55.26 165.74,54.61 R23.2
  pour Bottom (no thermals): 161.61,55.56 166.05,55.56 167.32,54.29 167.32,46.67 167,46.36 164.78,46.36 164.47,46.67 164.47,53.98 163.83,54.61 162.56,54.61
N$33
  Bottom 0.61: 134.38,43.26 PAD2.1
  Bottom 1.27: U1.10 134.38,43.26
  pour Bottom (no thermals): 127.95,47.94 134.62,47.94 137.48,45.09 137.48,40.96 134.3,37.78 126.68,37.78 126.68,46.67
N$34  (via drill 0.6 pad 1.93)
  Top 1.27: v141.29,31.12 U$4.1
  Bottom 1.27: R24.2 v141.29,31.12
N$35  (via drill 0.6 pad 1.93)
  Top 1.27: v141.29,20.96 U$4.9
  Bottom 1.27: R27.2 v141.29,20.96
N$36  (via drill 0.6 pad 1.93)
  Top 1.27: v141.29,23.5 U$4.7
  Bottom 1.27: R26.2 v141.29,23.5
N$37  (via drill 0.6 pad 1.93)
  Top 1.27: v141.29,26.04 U$4.5
  Bottom 1.27: R25.2 v141.29,26.04
N$38
  Top 0.508: R31.1 208.91,13.34 LED_RED1.1
  pour Top (no thermals): 208.6,14.29 210.5,14.29 210.82,13.97 210.82,10.8 208.91,8.89 203.2,8.89 202.25,9.84 202.25,15.56 203.52,16.83 206.06,16.83
N$39  (via drill 0.6 pad 1.93)
  Top 1.27: v185.74,19.69 SV4.4
  Bottom 0.508: R32.1 v185.74,19.69
N$40  (via drill 0.6 pad 1.93)
  Top 1.27: v188.28,19.69 SV4.2
  Bottom 0.508: R33.1 v188.28,19.69
N$41  (via drill 0.6 pad 1.93)
  Top 1.27: v175.58,13.34 176.85,12.07 SV4.5
  Bottom 0.508: R34.2 183.2,19.05 181.29,17.14 177.48,17.14 175.58,15.24 v175.58,13.34
N$42  (via drill 0.6 pad 1.93)
  Top 1.27: v173.04,13.34 173.04,11.43 174.94,9.52 185.1,9.52 185.74,10.16 SV4.3
  Bottom 0.508: R35.2 180.66,19.69 179.39,18.41 176.85,18.41 173.04,14.61 v173.04,13.34
N$43  (via drill 0.6 pad 1.93)
  Top 1.27: v190.82,19.69 190.82,12.7 190.18,12.07 SV4.1
  Bottom 0.508: R36.2 v190.82,19.69
N$44
  Top 1.27: SV3.4 191.45,86.04 192.41,86.99 197.8,86.99 199.07,85.72 R37.1
N$45
  Top 1.27: SV3.2 195.9,84.45 196.53,83.82 R38.1
N$46
  Top 1.27: SV3.5 R39.2
N$47
  Top 1.27: SV3.3 R40.2
N$48
  Top 1.27: SV3.1 R41.2
N$49
  Top 0.61: USART1.1 233.29,31.12
  Top 1.27: 233.29,31.12 R42.2
N$50
  cutout Top: 135.57,32.7 141.92,32.7 142.88,31.75 142.88,20.32 141.92,19.37 137.79,19.37 137.16,20 137.16,29.53 136.53,30.16 135.57,30.16 134.94,30.8 134.94,32.07
N$51
  cutout Bottom (no thermals): 188.28,85.72 194.94,85.72 195.58,85.09 195.58,80.96 194.94,80.33 185.74,80.33 185.1,80.96 185.1,82.55 185.74,83.18 186.69,83.18 187.64,84.14 187.64,85.09
N$52
  cutout Bottom (no thermals): 237.17,53.34 237.17,43.18 230.19,43.18 228.28,45.09 225.11,45.09 223.52,46.67 223.52,49.53 225.11,51.12 228.28,51.12 230.5,53.34
N$53
  cutout Bottom (no thermals): 157.16,30.48 157.16,18.41 167,18.41 167.96,19.37 167.96,29.53 167,30.48
N$54
  cutout Bottom (no thermals): 227.33,93.98 227.33,82.55 201.61,82.55 201.61,93.98
N$55
  cutout Bottom (no thermals): 169.54,92.07 161.93,92.07 157.8,87.95 135.57,87.95 135.57,81.28 169.54,81.28
N$56
  cutout Top (no thermals): 221.62,26.04 220.98,26.67 220.98,35.88 221.62,36.51 223.52,36.51 224.16,35.88 224.16,33.34 235.27,33.34 236.54,32.07 236.54,24.13 235.59,23.18 227.01,23.18 224.16,26.04
N$57
  Bottom 1.27: R24.1 147.95,28.57 152.08,28.57 | 152.08,28.57 152.08,33.66 153.35,34.93 D10.C | R43.2 152.08,28.57
N$58
  Bottom 1.27: R44.2 152.08,20.96 | 152.08,20.96 R27.1 | D7.C 153.35,13.34 152.08,14.61 152.08,20.96
N$59
  Bottom 0.508: S2.1 150.18,60.01 147.96,57.79 147.96,54.29 147,53.34 140.34,53.34 140.41,53.26 U1.15
  pour Bottom: 149.86,60.64 156.53,60.64 156.53,55.24 153.99,52.7 139.7,52.7 139.7,53.98 146.69,53.98 147.32,54.61 147.32,58.1
N$60
  Bottom 0.508: S2.4 149.54,67.63 144.78,62.87 139.38,62.87 136.21,59.69 136.21,48.9 137.79,47.31 | 142.69,47.31 U1.12
  Bottom 1.016: 137.79,47.31 142.69,47.31
N$61
  Bottom 0.508: S2.3 149.22,65.09 145.41,61.28 139.7,61.28 137.48,59.05 137.48,50.48 138.7,49.26
  Bottom 1.016: 138.7,49.26 U1.13
N$62
  Bottom 0.508: S2.2 148.91,62.55 146.05,59.69 140.02,59.69 138.75,58.42 138.75,52.07 139.56,51.26
  Bottom 1.016: 139.56,51.26 U1.14
RESET  (via drill 0.6 pad 1.93)
  Top 0.508: IC1.29 55.65,48.49 53.66,50.48 v51.75,50.48 | 91.23,26.24 91.23,30.59
  Top 1.27: 91.23,30.59 91.76,31.12 91.76,32.27 D3.C | R9.1 91.12,26.04 | 91.12,26.04 v81.92,26.04 | 91.23,26.24 91.12,26.13 91.12,26.04
  Bottom 0.508: v81.92,26.04 53.02,26.04 50.16,28.89 50.16,49.85 50.8,50.48 | 50.8,50.48 50.8,52.7 R1.2 | v51.75,50.48 50.8,50.48
  pour Bottom (no thermals): 51.75,54.93 49.53,54.93 48.9,54.29 48.9,28.57 52.07,25.4 83.19,25.4 83.5,25.72 83.5,26.67 83.19,26.99 79.69,26.99 74.61,32.07 73.66,31.12 53.66,31.12 52.7,32.07 52.7,53.98
RESET1  (via drill 0.6 pad 1.93)
  Top 0.508: v164.78,26.04 193.68,26.04 196.53,28.89 196.53,49.85 195.9,50.48 | 195.9,50.48 195.9,52.7 R22.2 | v194.94,50.48 195.9,50.48
  Bottom 0.508: IC3.29 191.05,48.49 193.04,50.48 v194.94,50.48 | 155.46,26.24 155.46,30.59
  Bottom 1.27: 155.46,30.59 154.94,31.12 154.94,32.27 D9.C | R25.1 155.57,26.04 | 155.57,26.04 v164.78,26.04 | 155.46,26.24 155.57,26.13 155.57,26.04
  pour Top (no thermals): 194.94,54.93 197.17,54.93 197.8,54.29 197.8,28.57 194.63,25.4 163.51,25.4 163.19,25.72 163.19,26.67 163.51,26.99 167,26.99 172.09,32.07 173.04,31.12 193.04,31.12 193.99,32.07 193.99,53.98
RX  (via drill 0.6 pad 1.93)
  Top 0.406: IC1.30 52.95,47.7 52.07,48.58 37.78,48.58 36.9,47.7
  Top 0.61: v24.13,34.93 36.9,47.7
  Bottom 0.61: D5.C 23.81,28.69
  Bottom 1.27: v24.13,34.93 24.13,31.44 R19.1 23.81,28.69
  pour Top: 54.93,47.94 54.61,47.7 52.7,47.7 52.07,48.26 38.73,48.26 24.13,33.66 22.23,33.66 21.27,34.61 21.27,35.88 34.92,49.53 50.16,49.53 50.8,48.9 53.98,48.9
RX1  (via drill 0.6 pad 1.93)
  Top 0.61: D12.C 222.89,28.69
  Top 1.27: v222.57,34.93 222.57,31.44 R42.1 222.89,28.69
  Bottom 0.406: IC3.30 193.75,47.7 194.63,48.58 208.91,48.58 209.8,47.7
  Bottom 0.61: v222.57,34.93 209.8,47.7
  pour Bottom: 191.77,47.94 192.09,47.7 193.99,47.7 194.63,48.26 207.96,48.26 222.57,33.66 224.47,33.66 225.43,34.61 225.43,35.88 211.77,49.53 196.53,49.53 195.9,48.9 192.72,48.9
SCK  (via drill 0.6 pad 1.93)
  Top 0.508: IC1.17 67.47,53.19 69.53,55.24 69.53,66.67 70.48,67.63 S1.5 83.19,67.89 83.19,69.21 85.09,71.12 v85.09,74.61 | 91.76,17.03 91.12,17.67 91.12,23.5
  Top 0.61: D2.C 91.76,17.03
  Top 1.27: R10.1 91.12,23.5 v81.92,23.5
  Bottom 1.27: v81.92,23.5 84.45,23.5 85.09,24.13 85.09,29.21 83.19,31.12 81.6,31.12 77.47,35.24 77.47,43.18 80.01,45.72 81.6,45.72 85.09,49.21 v85.09,74.61
  pour Top: 69.53,64.13 72.07,66.67 72.39,66.99 84.14,66.99 84.45,67.31 84.45,68.9 84.45,70.48 83.19,69.21 80.64,69.21 79.69,68.26 70.17,68.26 69.22,67.31 69.22,64.13
SCK1  (via drill 0.6 pad 1.93)
  Top 1.27: v164.78,23.5 162.24,23.5 161.61,24.13 161.61,29.21 163.51,31.12 165.1,31.12 169.23,35.24 169.23,43.18 166.69,45.72 165.1,45.72 161.61,49.21 v161.61,74.61
  Bottom 0.508: IC3.17 179.22,53.19 177.16,55.24 177.16,66.67 176.21,67.63 S2.5 163.51,67.89 163.51,69.21 161.61,71.12 v161.61,74.61 | 154.94,17.03 155.57,17.67 155.57,23.5
  Bottom 0.61: D8.C 154.94,17.03
  Bottom 1.27: R26.1 155.57,23.5 v164.78,23.5
  pour Bottom: 177.16,64.13 174.31,66.99 162.56,66.99 162.24,67.31 162.24,70.48 163.51,69.21 166.05,69.21 167,68.26 176.53,68.26 177.48,67.31 177.48,64.13
SS
  Top 0.508: IC1.14 72.32,50.09 75.25,53.02 75.25,58.74 76.52,60.01 S1.8
  pour Top: 83.5,60.64 76.2,60.64 74.93,59.37 74.93,53.02 72.39,50.48 72.39,49.85 76.52,49.85 78.11,51.44 78.11,54.93 80.33,57.15 82.87,57.15 83.82,58.1 83.82,60.33
SS1
  Bottom 0.508: IC3.14 174.38,50.09 171.45,53.02 171.45,58.74 170.18,60.01 S2.8
  pour Bottom: 163.19,60.64 170.5,60.64 171.77,59.37 171.77,53.02 174.31,50.48 174.31,49.85 170.18,49.85 168.59,51.44 168.59,54.93 166.37,57.15 163.83,57.15 162.88,58.1 162.88,60.33
TXD  (via drill 0.6 pad 1.93)
  Top 0.61: v19.68,26.04 40.55,46.9 IC1.31
  Bottom 1.27: USART.2 v19.68,26.04
  pour Top: 19.05,27.62 19.05,24.77 20,23.81 26.35,23.81 47.62,45.09 55.56,45.09 57.47,46.99 40.01,46.99 22.86,29.84 21.27,29.84
TXD1  (via drill 0.6 pad 1.93)
  Top 1.27: USART1.2 v227.01,26.04
  Bottom 0.61: v227.01,26.04 206.15,46.9 IC3.31
  pour Bottom: 227.65,27.62 227.65,24.77 226.69,23.81 220.34,23.81 199.07,45.09 191.13,45.09 189.23,46.99 206.69,46.99 223.84,29.84 225.43,29.84
VCC  (via drill 0.7 pad 1.93)
  Top 0.61: 22.86,62.72 20.91,62.72 IC2.1 20.68,59.09 C12.1 | 22.86,62.72 D6.C | v22.86,60.96 22.86,62.72
  pour Top (no thermals): 23.5,63.5 20.32,63.5 19.68,62.87 19.68,62.23 20.32,61.6 20.32,58.42 20.95,57.79 21.59,57.79 24.13,57.79 25.4,59.05 25.4,60.33 25.4,62.23 24.13,63.5
  pour Bottom (no thermals): 23.5,55.88 25.4,57.79 25.4,59.05 22.86,61.6 21.59,61.6 20.95,60.96 20.95,56.52 19.68,55.24 8.26,55.24 5.71,52.7 5.71,46.36 8.26,43.81 20.95,43.81 22.23,45.09 22.23,46.36 20.95,47.62 10.16,47.62 8.89,48.9 8.89,52.7 10.16,53.98 22.86,53.98 23.5,54.61
VCC1  (via drill 0.7 pad 1.93)
  Bottom 0.61: 223.84,62.72 225.79,62.72 IC4.1 226.02,59.09 C11.1 | 223.84,62.72 D11.C | v223.84,60.96 223.84,62.72
  pour Bottom (no thermals): 222.57,63.5 226.38,63.5 227.01,62.87 227.01,62.23 226.38,61.6 226.38,58.42 225.74,57.79 222.57,57.79 221.3,59.05 221.3,62.23
  pour Top (no thermals): 223.2,55.88 221.3,57.79 221.3,59.05 223.84,61.6 225.11,61.6 225.74,60.96 225.74,56.52 227.01,55.24 238.44,55.24 240.98,52.7 240.98,46.36 238.44,43.81 225.74,43.81 224.47,45.09 224.47,46.36 225.74,47.62 236.54,47.62 237.81,48.9 237.81,52.7 236.54,53.98 223.84,53.98 223.2,54.61

## Text on the board
Top: J. Trzyna / M. Szlachetka / RoboDrift2015 | GND
Bottom: J. Trzyna / M. Szlachetka / RoboDrift2015 | GND